# EAGLE board hunger cube (EAGLE 6.4)
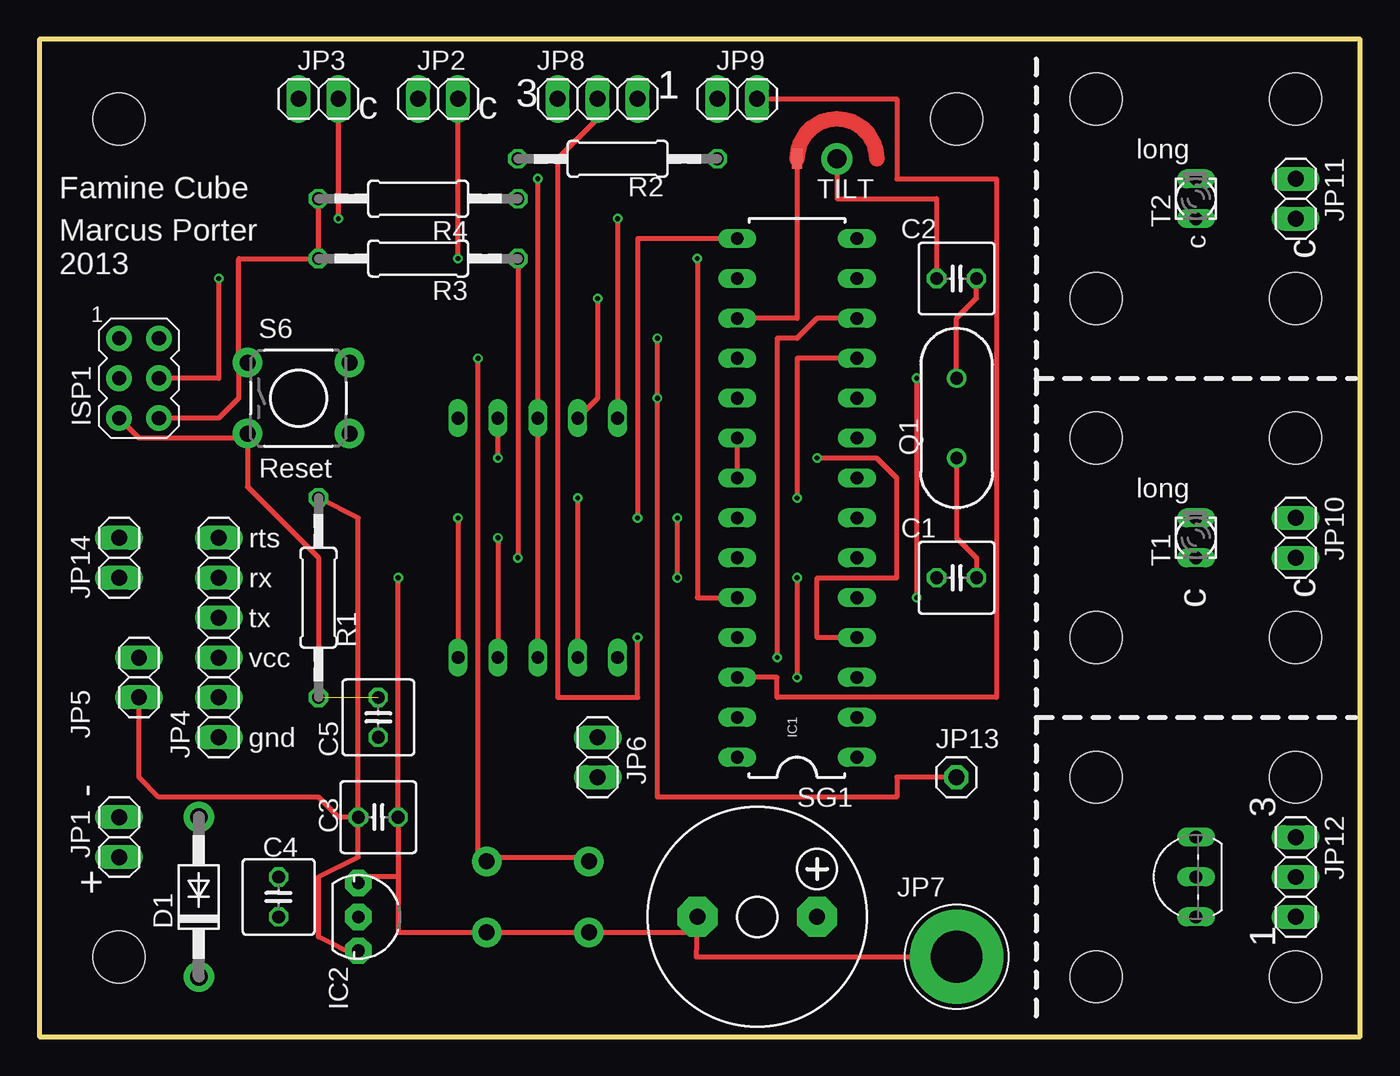
[diagram p0: board, top side]
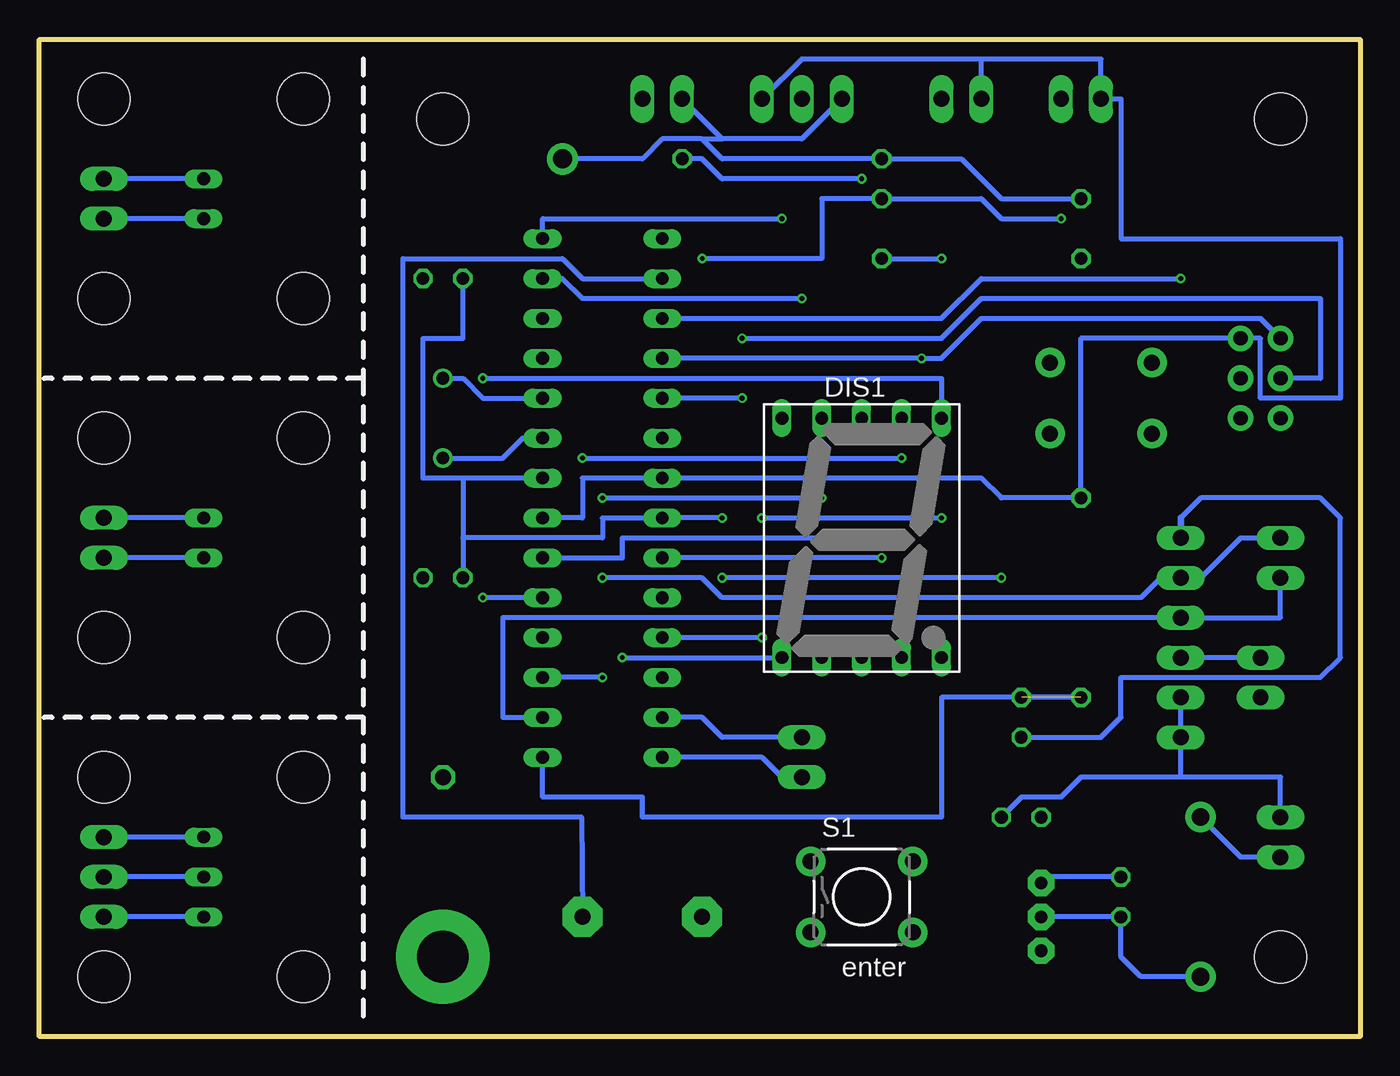
[diagram p1: board, bottom side, seen from below]

Size 84.12 x 63.49 mm. Coordinates in mm from the lower left corner, seen from the top.
Outline: 0,0 84.12,0 84.12,63.49 0,63.49 0,0
Copper layers (1*16): Top 0.035mm / dielectric 0.2mm / Bottom 0.035mm
Design rules "mkp SeeedStudio_DRU_no_angle_20130527": minimum track width 6mil, minimum drill 12mil, track to track 6mil, track to pad 6mil, pad to pad 6mil, via to via 6mil, smd to smd 0mil, copper to edge 10mil, drill to drill 10mil, minimum pad ring 6mil, minimum via ring 6mil, stop-mask expansion 2mil, vias tented up to drill 25mil, thermal gap 10mil
Holes 3.3 mm at 80.01,59.69 67.31,59.69 67.31,46.99 80.01,46.99 67.31,38.1 80.01,38.1 67.31,25.4 80.01,25.4 67.31,3.81 80.01,3.81 67.31,16.51 80.01,16.51

## Footprints (pad centres in the part's own frame; a part is rotated, then mirrored left to right if it is on the bottom)
C025-050X050 = drill 0.813 octagon: 1 -1.27,0; 2 1.27,0
DO41-10 = drill 1.118 pad 1.93: A 5.08,0; C -5.08,0
HDSP-M = drill 0.813 long: 1 -5.08,-7.62; 2 -2.54,-7.62; 3 0,-7.62; 4 2.54,-7.62; 5 5.08,-7.62; 6 5.08,7.62; 7 2.54,7.62; 8 0,7.62; 9 -2.54,7.62; 10 -5.08,7.62
DIL28-3 = drill 0.813 long: 1 -16.51,-3.81; 2 -13.97,-3.81; 3 -11.43,-3.81; 4 -8.89,-3.81; 5 -6.35,-3.81; 6 -3.81,-3.81; 7 -1.27,-3.81; 8 1.27,-3.81; 9 3.81,-3.81; 10 6.35,-3.81; 11 8.89,-3.81; 12 11.43,-3.81; 13 13.97,-3.81; 14 16.51,-3.81; 15 16.51,3.81; 16 13.97,3.81; 17 11.43,3.81; 18 8.89,3.81; 19 6.35,3.81; 20 3.81,3.81; 21 1.27,3.81; 22 -1.27,3.81; 23 -3.81,3.81; 24 -6.35,3.81; 25 -8.89,3.81; 26 -11.43,3.81; 27 -13.97,3.81; 28 -16.51,3.81
TO92-INLINE = drill 0.813 pad 1.676 octagon: 1 -2.159,0; 2 0,0; 3 2.159,0
AVRISP = drill 0.9 pad 1.626: 1 -1.27,2.54; 2 1.27,2.54; 3 -1.27,0; 4 1.27,0; 5 -1.27,-2.54; 6 1.27,-2.54
1X02 = drill 1.016 long: 1 -1.27,0; 2 1.27,0
1X06 = drill 1.016 long: 1 -6.35,0; 2 -3.81,0; 3 -1.27,0; 4 1.27,0; 5 3.81,0; 6 6.35,0
SCREW-HOLE-PAD = drill 3.302 pad 5.969: SCREW 0,0
1X03 = drill 1.016 long: 1 -2.54,0; 2 0,0; 3 2.54,0
1X01 = drill 1.016 octagon: 1 0,0
HC49US = drill 0.813: 1 -2.54,0; 2 2.54,0
0207/12 = drill 0.813 octagon: 1 -6.35,0; 2 6.35,0
TACTILE-PTH = drill 1.016 pad 1.88: 1 -3.251,2.261; 2 3.251,2.261; 3 -3.251,-2.261; 4 3.251,-2.261
F/CM12P = drill 1.016 pad 2.54 octagon: + 3.81,0; - -3.81,0
STAND-OFF = hole 3.302: 0,0
BPX81 = drill 0.813 long: C 1.27,0; E -1.27,0
TO92-EBC = drill 0.813 long: B 0,-1.27; C 2.54,-1.27; E -2.54,-1.27
TILT = drill 1.2 pad 2: CENTER 0,0 | smd 1.27 x 0.635: SLEEVE 0,2.54

## Placement (x,y rotation side)
C1  18pF  [C025-050X050]  58.42,29.21 0 top
C2  18pF  [C025-050X050]  58.42,48.26 0 top
C3  1uf  [C025-050X050]  21.59,13.97 0 top
C4  1uf  [C025-050X050]  15.24,8.89 90 top
C5  .1uf  [C025-050X050]  21.59,20.32 270 top
D1  [DO41-10]  10.16,8.89 90 top
DIS1  display  [HDSP-M]  31.75,31.75 0 bottom
IC1  AVR-MEGA8-PPTH  [DIL28-3]  48.26,34.29 90 top
IC2  LDO 5v  [TO92-INLINE]  20.32,7.62 270 top
ISP1  AVRISP-6  [AVRISP]  6.35,41.91 0 top
JP1  Battery  [1X02]  5.08,12.7 90 top
JP2  Light1  [1X02]  25.4,59.69 0 top
JP3  Light2  [1X02]  17.78,59.69 0 top
JP4  FTDI  [1X06]  11.43,25.4 90 top
JP5  Aux Pwr  [1X02]  6.35,22.86 90 top
JP6  A5 A4  [1X02]  35.56,17.78 270 top
JP7  Connected screw hole  [SCREW-HOLE-PAD]  58.42,5.08 0 top
JP8  TEMP  [1X03]  35.56,59.69 0 top
JP9  Magnet  [1X02]  44.45,59.69 0 top
JP10  RLight1  [1X02]  80.01,31.75 270 top
JP11  Rlight2  [1X02]  80.01,53.34 270 top
JP12  Rtemp  [1X03]  80.01,10.16 270 top
JP13  R screw  [1X01]  58.42,16.51 0 top
JP14  D0 D1  [1X02]  5.08,30.48 90 top
Q1  16Mhz  [HC49US]  58.42,39.37 270 top
R1  10K  [0207/12]  17.78,27.94 90 top
R2  100  [0207/12]  36.83,55.88 0 top
R3  10K  [0207/12]  24.13,49.53 180 top
R4  10K  [0207/12]  24.13,53.34 180 top
S1  enter  [TACTILE-PTH]  31.75,8.89 0 bottom
S6  reset  [TACTILE-PTH]  16.51,40.64 0 top
SG1  F/CM12P  [F/CM12P]  45.72,7.62 0 top
ST1  STAND-OFF  [STAND-OFF]  5.08,5.08 0 top
ST2  STAND-OFF  [STAND-OFF]  58.42,58.42 0 top
ST3  STAND-OFF  [STAND-OFF]  5.08,58.42 0 top
T1  light  [BPX81]  73.66,31.75 90 top
T2  light  [BPX81]  73.66,53.34 90 top
TEMPERATURE  Temperature  [TO92-EBC]  72.39,10.16 90 top
TILT  TILT-SENSOR  [TILT]  50.8,55.88 90 top

## Library data of the parts
C1-C5 R1-R4 = resistor
D1 IC2 ISP1 = adafruit
DIS1 = display-hp; OC_FARNELL: unknown; OC_NEWARK: unknown
IC1 Q1 S1 S6 ST1-ST3 = SparkFun
JP1-JP6 JP8-JP14 = pinhead
JP7 = connected-screw
SG1 = buzzer; OC_FARNELL: unknown; OC_NEWARK: unknown
T1 T2 = opto-trans-siemens; OC_FARNELL: unknown; OC_NEWARK: unknown
TEMPERATURE = transistor
TILT = tilt-sensor

## Nets
+5V: C3.1 IC1.7 IC1.20 IC1.21 IC2.3 ISP1.2 JP2.1 JP3.1 JP5.1 JP8.3 R1.2
A0-LIGHT1: IC1.23 JP2.2 R3.1
A1-LIGHT2: IC1.24 JP3.2 R4.1
A2-TEMP: IC1.25 JP8.2
A3-MAGNET: IC1.26 JP9.2
A4: IC1.27 JP6.1
A5: IC1.28 JP6.2
D0-RDX: IC1.2 JP4.4 JP14.1
D1-TDX: IC1.3 JP4.5 JP14.2
D2-SEGA: DIS1.7 IC1.4
D3-SEBB: DIS1.6 IC1.5
D4-SEGC: DIS1.4 IC1.6
D5-SEGD: DIS1.2 IC1.11
D6-SEGE: DIS1.1 IC1.12
D7-SEGF: DIS1.9 IC1.13
D8-SEGG: DIS1.10 IC1.14
D9-DP: DIS1.5 IC1.15
D10-BUZZER: IC1.16 SG1.+
D11-MOSI-TILT: IC1.17 ISP1.4 TILT.SLEEVE
D12-MISO-ENTER: IC1.18 ISP1.1 S1.1 S1.2
D13-SCK-SCREW: IC1.19 ISP1.3 JP13.1
DSP-GND: DIS1.3 DIS1.8 R2.2
GND: C1.1 C2.1 C3.2 C4.2 IC1.8 IC1.22 IC2.1 ISP1.6 JP1.2 JP4.1 JP4.2 JP7.SCREW JP8.1 JP9.1 R2.1 R3.2 R4.2 S1.3 S1.4 S6.1 SG1.- TILT.CENTER
N$1: C5.2 JP4.6
N$2: D1.A JP1.1
N$3: C1.2 IC1.9 Q1.2
N$4: C2.2 IC1.10 Q1.1
N$5: JP4.3 JP5.2
N$13: JP10.2 T1.E
N$15: JP11.2 T2.E
N$16: JP11.1 T2.C
N$17: JP10.1 T1.C
N$20: JP12.3 TEMPERATURE.E
N$21: JP12.2 TEMPERATURE.B
N$22: JP12.1 TEMPERATURE.C
RST: C5.1 IC1.1 ISP1.5 R1.1 S6.3
VCC: C4.1 D1.C IC2.2

## Tracks (layer width: path | path; a pad name or v marks a point on that pad's centre or on a via)
+5V
  Top 0.305: IC1.21 IC1.20 | C3.1 20.32,11.43 17.78,10.16 17.78,6.35 20.32,5.08 IC2.3 | R1.2 20.32,33.02 C3.1 | JP5.1 6.35,16.51 7.62,15.24 17.78,15.24 19.05,13.97 C3.1
  Bottom 0.305: JP8.3 35.56,62.23 24.13,62.23 | 24.13,62.23 16.51,62.23 JP3.1 15.24,59.69 15.24,50.8 1.27,50.8 1.27,40.64 6.35,40.64 6.35,44.45 ISP1.2 17.78,44.45 R1.2 22.86,34.29 24.13,35.56 IC1.21 49.53,35.56 49.53,33.02 IC1.7 | JP2.1 24.13,62.23
A0-LIGHT1  (via drill 0.3)
  Top 0.305: R3.1 v30.48,30.48 | v26.67,49.53 JP2.2
  Bottom 0.305: v30.48,30.48 IC1.23 | R3.1 v26.67,49.53
A1-LIGHT2  (via drill 0.3)
  Top 0.305: IC1.24 41.91,27.94 v41.91,49.53 | v19.05,52.07 JP3.2
  Bottom 0.305: v41.91,49.53 34.29,49.53 34.29,53.34 R4.1 24.13,53.34 22.86,52.07 v19.05,52.07
A2-TEMP  (via drill 0.3)
  Top 0.305: v38.1,25.4 38.1,21.59 33.02,21.59 33.02,55.88 35.56,58.42 JP8.2
  Bottom 0.305: v38.1,25.4 IC1.25
A3-MAGNET
  Top 0.305: JP9.2 54.61,59.69 54.61,54.61 60.96,54.61 60.96,21.59 46.99,21.59 46.99,22.86 IC1.26
A4
  Bottom 0.305: IC1.27 41.91,20.32 40.64,19.05 JP6.1
A5
  Bottom 0.305: IC1.28 38.1,17.78 36.83,16.51 JP6.2
D0-RDX
  Bottom 0.305: JP14.1 5.08,26.67 JP4.4 49.53,26.67 54.61,26.67 54.61,20.32 IC1.2
D1-TDX  (via drill 0.3)
  Top 0.305: v48.26,29.21 v48.26,22.86
  Bottom 0.305: v48.26,22.86 IC1.3 | v48.26,29.21 41.91,29.21 40.64,27.94 13.97,27.94 12.7,29.21 JP4.5 10.16,29.21 7.62,31.75 JP14.2
D2-SEGA  (via drill 0.3)
  Top 0.305: v29.21,36.83 DIS1.7 | v49.53,36.83 53.34,36.83 54.61,35.56 54.61,29.21 49.53,29.21 49.53,25.4 IC1.4
  Bottom 0.305: v49.53,36.83 v29.21,36.83
D3-SEBB  (via drill 0.3)
  Top 0.305: v55.88,27.94 v55.88,41.91
  Bottom 0.305: DIS1.6 26.67,41.91 v55.88,41.91 | IC1.5 v55.88,27.94
D4-SEGC  (via drill 0.3)
  Top 0.305: v29.21,31.75 DIS1.4
  Bottom 0.305: v29.21,31.75 46.99,31.75 46.99,30.48 IC1.6
D5-SEGD  (via drill 0.3)
  Top 0.305: v34.29,34.29 DIS1.2 | v48.26,34.29 48.26,43.18 IC1.11
  Bottom 0.305: v48.26,34.29 v34.29,34.29
D6-SEGE  (via drill 0.3)
  Top 0.305: v46.99,24.13 46.99,44.45 48.26,44.45 49.53,45.72 IC1.12
  Bottom 0.305: v46.99,24.13 DIS1.1
D7-SEGF  (via drill 0.3)
  Top 0.305: DIS1.9 35.56,40.64 v35.56,46.99
  Bottom 0.305: v35.56,46.99 49.53,46.99 50.8,48.26 IC1.13
D8-SEGG  (via drill 0.3)
  Top 0.305: v36.83,52.07 DIS1.10
  Bottom 0.305: IC1.14 52.07,52.07 v36.83,52.07
D9-DP  (via drill 0.3)
  Top 0.305: v26.67,33.02 DIS1.5 | v38.1,33.02 38.1,50.8 IC1.15
  Bottom 0.305: v38.1,33.02 v26.67,33.02
D10-BUZZER
  Bottom 0.305: IC1.16 49.53,48.26 50.8,49.53 60.96,49.53 60.96,13.97 49.6,13.97 SG1.+
D11-MOSI-TILT  (via drill 0.3)
  Top 0.305: IC1.17 48.26,45.72 TILT.SLEEVE | ISP1.4 11.43,41.91 v11.43,48.26
  Bottom 0.305: v11.43,48.26 24.13,48.26 26.67,45.72 IC1.17
D12-MISO-ENTER  (via drill 0.3)
  Top 0.305: S1.1 34.29,11.43 29.21,11.43 S1.2 27.94,11.43 v27.94,43.18
  Bottom 0.305: IC1.18 v27.94,43.18 26.67,43.18 24.13,45.72 6.35,45.72 ISP1.1
D13-SCK-SCREW  (via drill 0.3)
  Top 0.305: JP13.1 54.61,16.51 54.61,15.24 39.37,15.24 v39.37,40.64 v39.37,44.45
  Bottom 0.305: v39.37,40.64 IC1.19 | ISP1.3 2.54,41.91 2.54,46.99 24.13,46.99 26.67,44.45 v39.37,44.45
DSP-GND  (via drill 0.3)
  Top 0.305: DIS1.3 DIS1.8 v31.75,54.61
  Bottom 0.305: R2.2 41.91,55.88 40.64,54.61 v31.75,54.61
GND  (via drill 0.3)
  Top 0.305: R4.2 R3.2 12.7,49.53 12.7,43.18 | ISP1.6 11.43,39.37 12.7,40.64 12.7,43.18 | 12.7,43.18 S6.1 | 22.86,10.16 20.32,10.16 IC2.1 | 22.86,10.16 C3.2 v22.86,29.21 | 22.86,10.16 22.86,6.63 S1.4 S1.3 41.84,6.63 SG1.- 41.84,5.08 JP7.SCREW | v40.64,29.21 v40.64,33.02 | TILT.CENTER 50.8,53.34 57.15,53.34 C2.1
  Bottom 0.305: 40.64,57.15 JP9.1 | 40.64,57.15 35.56,57.15 JP8.1 | TILT.CENTER 45.72,55.88 44.45,57.15 41.91,57.15 | 41.91,57.15 40.64,55.88 R2.1 25.4,55.88 22.86,53.34 R4.2 | 41.91,57.15 40.64,57.15 | C4.2 20.32,10.16 IC2.1 | JP4.2 JP4.1 11.43,16.51 | C3.2 21.59,15.24 19.05,15.24 17.78,16.51 11.43,16.51 | JP1.2 5.08,16.51 11.43,16.51 | v40.64,33.02 IC1.22 48.26,33.02 48.26,31.75 57.15,31.75 | v22.86,29.21 v40.64,29.21 | 57.15,31.75 C1.1 | IC1.8 57.15,35.56 | 57.15,35.56 57.15,31.75 | 57.15,35.56 59.69,35.56 59.69,44.45 57.15,44.45 C2.1
N$1
  Bottom 0.305: C5.2 16.51,19.05 15.24,20.32 15.24,22.86 2.54,22.86 1.27,24.13 1.27,33.02 2.54,34.29 10.16,34.29 11.43,33.02
  Bottom 0.406: 11.43,33.02 JP4.6
N$2
  Bottom 0.305: JP1.1 7.62,11.43 D1.A
N$3
  Top 0.305: C1.2 59.69,30.48 58.42,31.75 Q1.2
  Bottom 0.305: IC1.9 53.34,38.1 54.61,36.83 Q1.2
N$4
  Top 0.305: C2.2 59.69,46.99 58.42,45.72 Q1.1
  Bottom 0.305: IC1.10 55.88,40.64 57.15,41.91 Q1.1
N$5
  Bottom 0.305: JP5.2 JP4.3
N$13
  Bottom 0.305: T1.E JP10.2
N$15
  Bottom 0.305: T2.E JP11.2
N$16
  Bottom 0.305: T2.C JP11.1
N$17
  Bottom 0.305: T1.C JP10.1
N$20
  Bottom 0.305: TEMPERATURE.E JP12.3
N$21
  Bottom 0.305: TEMPERATURE.B JP12.2
N$22
  Bottom 0.305: TEMPERATURE.C JP12.1
RST  (1 unrouted)
  Top 0.305: ISP1.5 6.35,38.1 12.7,38.1 S6.3 13.26,35 17.78,30.48 R1.1
  Bottom 0.305: 12.7,38.1 S6.3 | R1.1 26.67,21.59 26.67,13.97 45.72,13.97 45.72,15.24 52.07,15.24 IC1.1
VCC
  Bottom 0.305: IC2.2 C4.1 15.24,5.08 13.97,3.81 D1.C

## Text on the board
tPlace: c | c | long | c | c | Reset | long | c | c
bPlace: enter
tNames: 3 | 1 | Famine Cube | Marcus Porter / 2013 | rts | rx | tx | vcc | gnd | - | 3 | + | 1
tDocu: dp | 1
bDocu: DP | 1